# Altium PCB Central_Unit_AgOpenGPS.pcbdoc (part 3 of 4)
Units mm, origin at the board's own origin, x right, y up, seen from the top; angles counter-clockwise.
Board outline 200.19 x 122.57 mm, 2 copper layers (Top Layer, Bottom Layer); 278 components, 223 nets, 1042 pads, 421 vias.
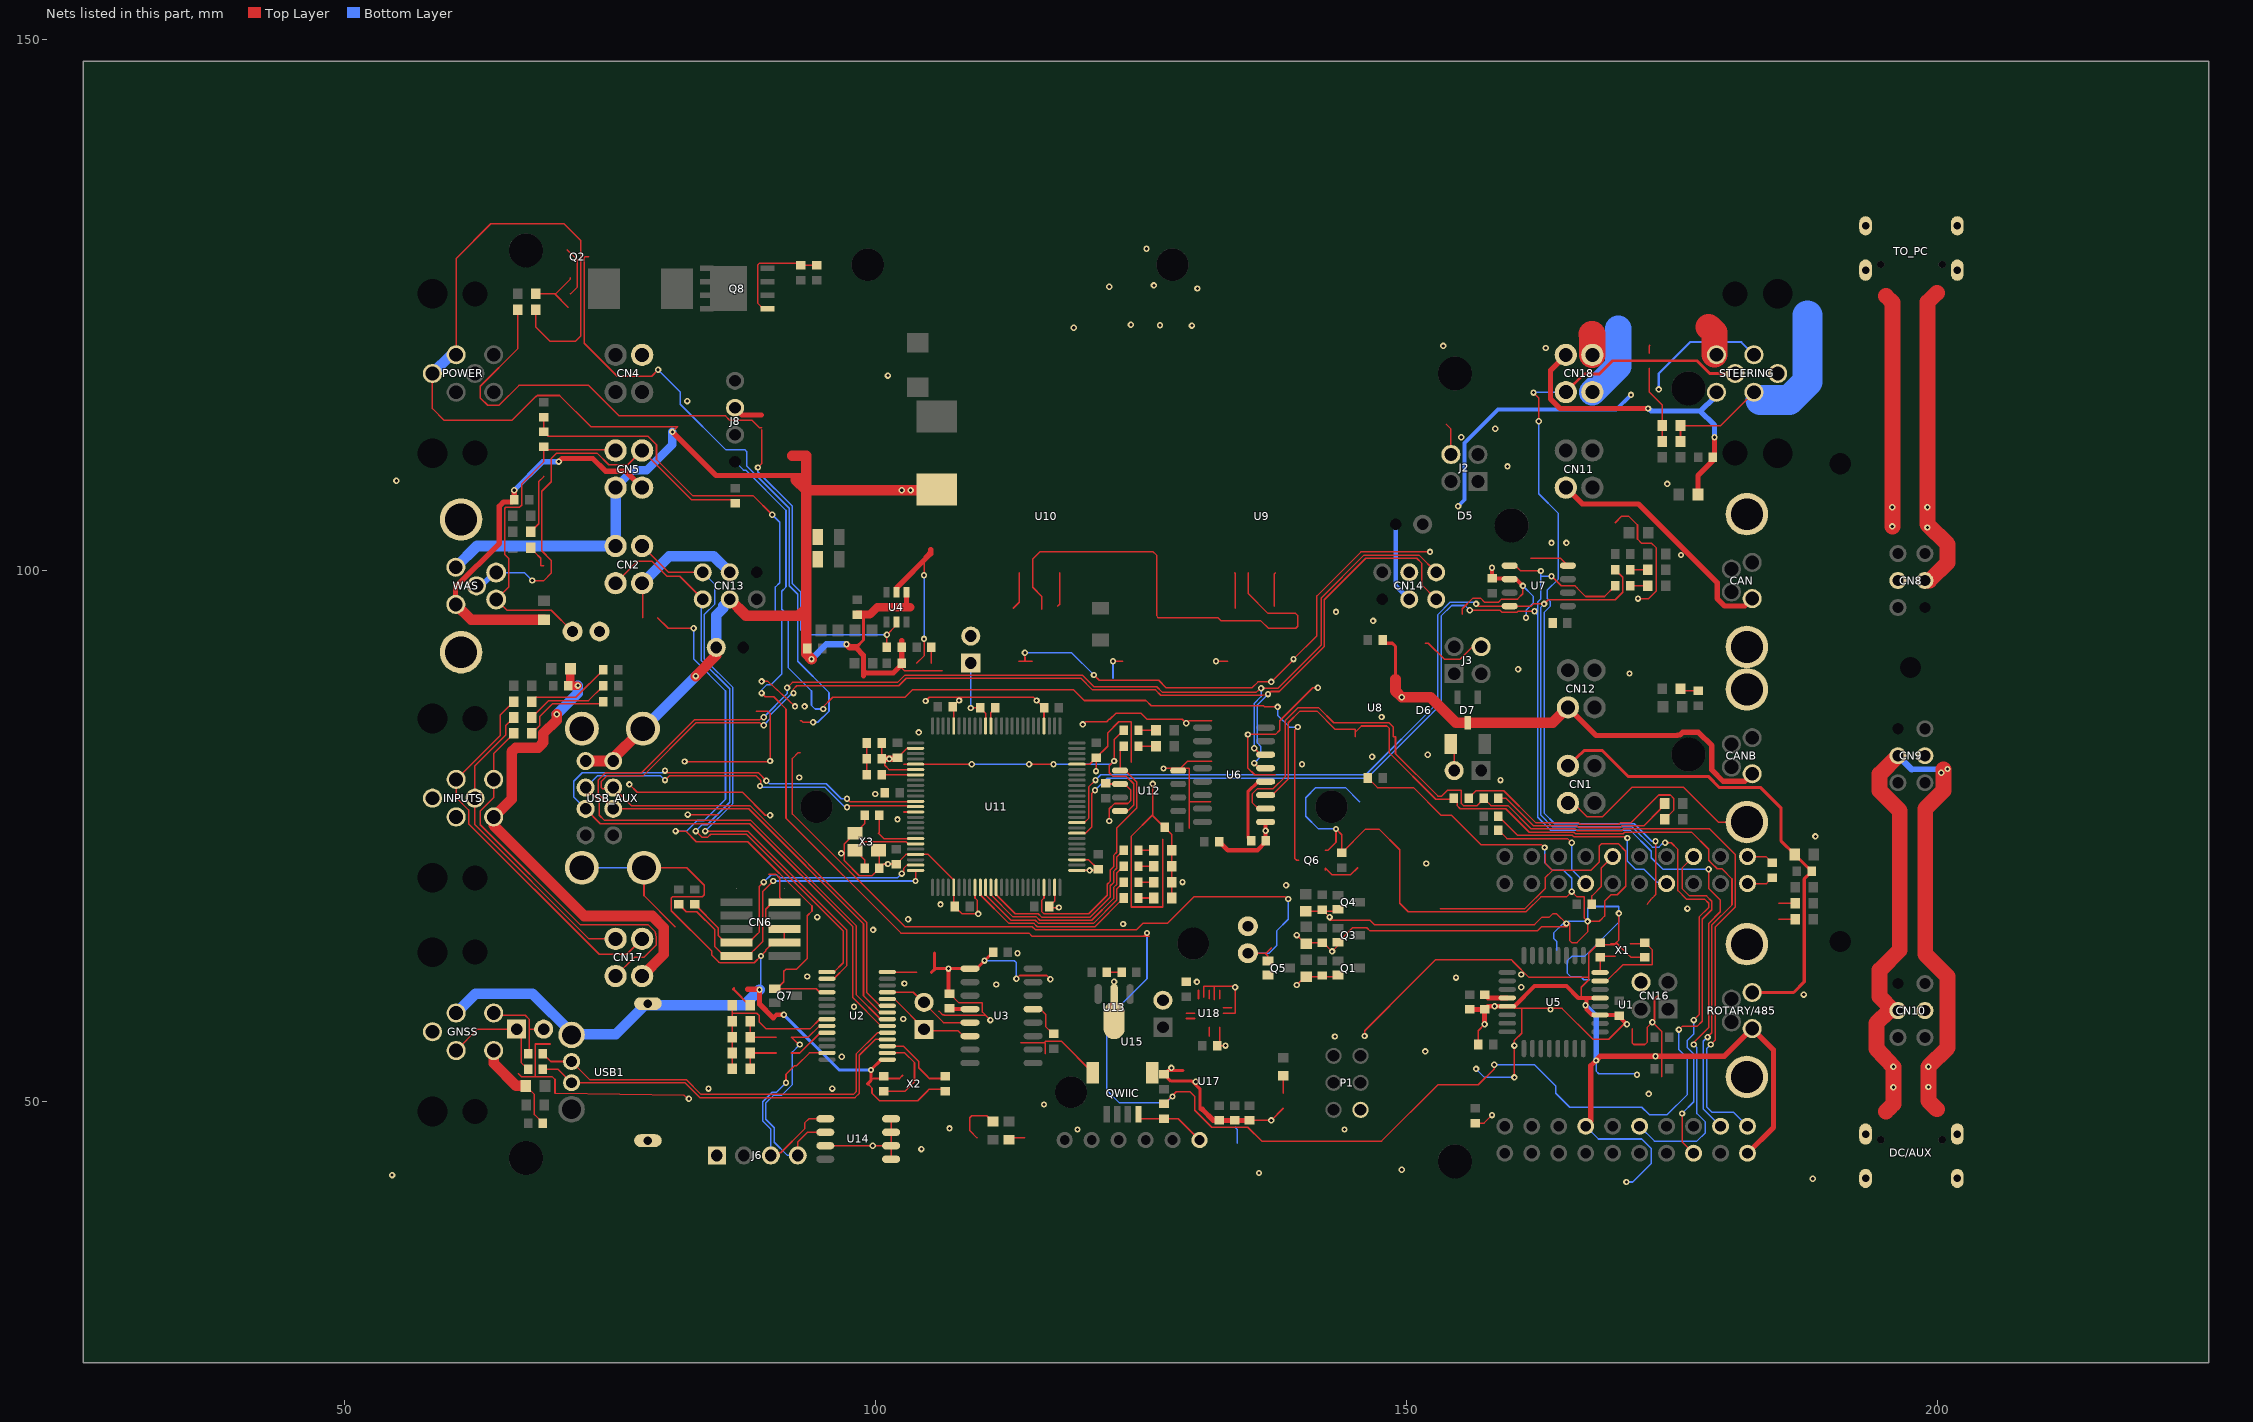
[diagram p3: the nets of this part, all layers, seen from the top]

## Via types
v1: diameter 0.6, hole 0.3, Top Layer to Bottom Layer, 420 vias
v2: diameter 0.61, hole 0.305, Top Layer to Bottom Layer, 1 vias

## Nets (pads, with @x,y where several pads share a name; then routed paths per layer and width w, separated by ;. In a path a pad name is that pad's centre, name@x,y a point inside that pad or via, vN(x,y) a via of type N, cw(c..) or ccw(c..) an arc to the next point about the centre after c; other vN are vias at no path point) (continued)
GND: 12V.1 BOOT.2 C1.1 C2.2 C3.2 C4.2 C5.1 C6.1 C8.1 C9.1 C10.1 C11.2 C12.1 C13.1 C14.2 C15.2 C17.1 C18.1 C19.1 C20.1 C21.1 C22.2 C23.2 C24.1 C25.1 C26.2 C27.1 C28.1 C29.1 C32.2 C33.1 C34.2 C35.2 C36.2 C37.1 C38.2 C39.1 C40.2 C41.1 C42.1 C43.1 C44.1 C45.1 C46.1 C47.1 C48.1 C49.1 C50.1 C51.1 C52.2 C53.2 C54.1 C55.1 C56.2 C57.1 CAN.3 CAN.Shield CANB.3 CANB.Shield CN1.3 CN2.4 CN4.3 CN5.2 CN6.3 CN6.5 CN6.9 CN7.2 CN11.3 CN12.3 CN13.4 CN14.4 CN15.2 CN16.4 D2.1 D5.3 D6.3 D7.3 GNSS.4 GNSS.Shield INPUTS.3 INPUTS.Shield J5.2 J6.1 J7.2 LED1.1 LED2.1 LED3.1 LED4.1 P1.6 POWER.3 POWER.Shield Q1.2 Q3.2 Q4.2 Q5.2 Q6.2 QWIIC.1 QWIIC.5 QWIIC.6 R1.1 R10.1 R14.1 R16.2 R18.1 R25.2 R26.2 R27.2 R36.1 R38.2 R42.2 R44.1 R47.1 R70.1 R77.2 R81.2 R82.2 R93.2 ROTARY/485.3 ROTARY/485.Shield STEERING.3 STEERING.Shield U1.1 U1.4 U1.27 U2.1 U3.1 U4.1 U5.3 U5.5 U5.21 U6.1 U7.2 U7.8 U8.5 U11.2 U11.6 U11.14 U11.22 U11.30 U11.34 U11.49 U11.51 U11.53 U11.71 U11.79 U11.96 U12.2 U12.8 U13.2 U14.1 U14.2 U14.3 U14.4 U14.7 U15.6 U17.1 U17.3 U18.5 U18.7 U18.10 U18.12 USB1.0 USB1.4 USB_AUX.4 USB_AUX.8 USB_AUX.9 WAS.3 WAS.Shield X1.2 X1.4 X2.2 X2.4 X3.2 X3.4 | length 1208.7
  Top Layer w0.145: POWER.Shield@58.287,118.566 58.287,115.266 59.387,114.166 65.787,114.166 68.02,116.399 68.05,116.399 68.143,116.493 70.26,116.493 73.187,113.566 81.387,113.566 v1(80.887,113.066) ; POWER.3@60.519,120.334 60.519,129.398 63.788,132.667 70.686,132.667 72.236,131.117 72.236,122.065 71.786,121.615 69.337,121.615 68.037,122.916 12V.1@68.037,124.566 ; 66.387,52.616 66.687,52.316 68.066,52.316 ; 69.387,55.416 67.987,55.416 67.987,52.316 69.587,52.316 69.832,52.072 69.832,50.765 81.987,50.566 v1(82.437,50.266) ; v1(76.837,79.866) 77.587,79.116 87.487,79.116 89.637,76.966 v1(90.087,76.966) ; USB_AUX.9@78.211,72.015 78.211,69.392 81.137,66.466 ; USB_AUX.9@78.212,72.017 82.238,72.017 83.887,70.366 83.887,69.466 83.688,69.266 80.887,69.266 80.788,69.167 80.788,67.965 84.588,64.165 84.588,63.784 85.245,63.129 85.387,63.066 88.588,63.066 v1(89.228,63.706) 89.688,64.165 89.688,64.267 90.381,64.96 CN6.3@91.437,64.961 CN6.5@91.437,66.231 ; v1(82.037,82.016) 90.037,82.016 v1(90.087,82.066) 90.087,86.568 89.889,86.766 88.786,86.766 ; v1(82.337,77.016) 85.187,77.016 ; v1(89.287,89.566) 89.887,89.566 v1@92.436,87.216 ; 89.987,71.416 90.587,71.416 90.987,71.016 90.987,69.221 CN6.9@91.437,68.771 90.343,68.77 89.688,68.115 89.688,66.766 90.221,66.23 CN6.5@91.437,66.231 ; CN6.5@90.252,66.231 CN6.5@91.437,66.231 ; U14.7@95.287,45.832 99.752,45.831 U14.2@101.487,45.832 ; X3.2@98.087,75.266 97.087,74.265 97.087,72.667 98.489,71.265 99.685,71.265 C39.1@100.387,71.966 ; X3.2@98.087,75.266 98.987,76.166 C37.1@98.987,76.966 ; C12.1@99.287,51.666 99.688,51.265 99.688,50.767 100.386,50.066 103.988,50.066 X2.2@104.787,50.866 ; X3.4@100.287,73.666 100.387,73.566 C39.1@100.387,71.966 100.787,72.366 101.987,72.366 102.887,73.266 U11.22@103.787,73.266 104.987,73.266 107.387,70.866 U11.30@107.387,70.166 107.387,68.466 C54.1@107.487,68.366 ; R82.2@100.587,82.266 100.887,82.266 100.887,81.666 101.288,81.265 U11.6@103.787,81.266 ; R82.2@100.587,82.266 R81.2@100.587,83.766 ; U14.1@101.487,44.562 U14.4@101.487,48.372 ; C47.1@102.087,82.366 102.987,83.266 U11.2@103.787,83.266 ; R70.1@102.487,91.266 102.487,90.816 102.737,90.566 106.287,90.566 ; 102.687,77.266 U11.14@103.787,77.266 ; v1(104.737,87.716) 105.087,88.066 108.48,88.066 ; 105.987,58.517 106.338,58.166 106.437,58.166 106.487,58.115 110.386,58.115 v1(110.837,57.666) ; C1.1@106.987,60.166 107.837,59.316 110.087,59.316 110.087,58.416 v1(110.837,57.666) ; U11.96@107.387,85.366 107.387,87.066 C46.1@107.287,87.166 108.187,88.066 114.887,88.066 C43.1@115.887,87.066 U11.79@115.887,85.366 ; C54.1@107.487,68.366 108.187,67.666 109.487,67.666 109.586,67.767 109.586,68.966 109.388,69.167 U11.34@109.387,70.166 ; v1(113.287,61.566) 113.587,61.866 116.137,61.866 v1(116.487,61.516) ; R26.2@113.487,91.466 R42.2@114.787,91.466 ; 113.687,55.516 115.887,55.516 116.037,55.666 117.537,55.666 QWIIC.5@120.487,52.716 ; v1(114.087,92.266) 114.097,91.465 ; 115.95,55.579 115.987,55.542 115.987,54.516 ; U11.49@116.887,70.166 116.887,68.866 C50.1@116.387,68.366 116.487,68.266 v1(117.287,68.266) ; U11.51@118.987,71.766 v1(120.185,71.766) 120.887,71.766 C41.1@120.987,71.866 120.087,72.766 U11.53@118.987,72.766 ; U11.71@118.987,81.766 120.187,81.766 C42.1@120.787,82.366 ; v1(119.537,85.516) 119.787,85.766 121.087,85.766 ; v1(120.587,90.166) 121.087,89.666 126.688,89.667 127.387,88.966 135.489,88.966 136.038,89.515 v1(137.287,89.516) 139.387,91.615 v1(139.387,91.666) 141.587,93.866 141.587,97.616 145.737,101.766 v1(152.237,101.766) ; v1(120.787,81.116) 120.787,82.268 120.887,82.367 C42.1@120.787,82.366 121.887,83.467 121.887,84.717 122.936,85.766 124.087,85.766 124.087,81.966 ; 120.987,85.766 121.787,85.766 122.013,85.992 122.087,85.992 122.661,86.566 125.023,86.566 125.597,85.992 128.912,85.992 v1(129.287,85.616) 129.537,85.866 131.687,85.866 ; C40.2@121.687,79.966 121.752,79.901 U12.2@123.047,79.901 123.503,79.901 124.036,79.365 124.036,78.316 123.787,78.067 122.538,78.067 122.037,77.566 v1(122.037,76.416) ; C53.2@121.787,62.166 C52.2@123.187,62.166 ; v1(122.387,91.466) R25.2@123.287,91.466 ; QWIIC.1@124.787,48.816 124.788,48.367 127.186,48.367 128.537,48.367 130.137,46.766 U15.6@130.386,46.766 ; 126.137,76.998 124.087,74.948 124.087,68.316 127.087,68.316 127.087,74.716 ; v1(126.137,79.916) 126.137,76.916 127.937,75.116 ; v1(127.137,81.366) 129.587,81.366 129.587,75.716 ; LED1.1@127.937,69.166 127.937,75.116 ; 127.937,74.606 127.937,75.116 ; U12.8@128.527,81.171 129.422,82.066 131.687,82.066 ; 129.586,78.237 131.588,78.217 ; 130.94,59.804 130.94,60.866 131.938,60.866 ; 131.938,59.566 131.938,60.866 ; 131.938,59.667 131.938,60.866 ; v1(132.087,91.466) R27.2@133.187,91.466 ; U18.5@132.439,56.966 132.439,55.518 C8.1@132.187,55.266 v1(132.987,55.266) ; U18.7@132.789,58.316 133.886,58.316 v1(133.886,60.767) 133.886,60.866 131.938,60.866 ; v1(135.087,84.566) 135.087,81.416 135.737,80.766 137.687,80.766 ; C25.1@135.239,48.217 v1(137.287,48.217) R10.1@138.429,49.358 ; v1@135.337,84.567 137.686,84.567 138.088,84.966 138.088,85.865 141.189,88.966 v1(141.687,88.966) ; v1(139.687,60.966) 140.587,61.867 R44.1@140.587,62.065 ; v1(139.687,65.666) 140.286,65.067 R47.1@140.587,65.067 ; R36.1@140.53,67.915 143.381,67.915 Q4.2@143.571,68.105 ; R44.1@140.587,61.766 143.432,61.766 Q1.2@143.571,61.905 ; R47.1@140.587,65.066 140.687,64.966 C29.1@142.087,64.966 142.187,64.966 v1(143.019,64.134) 143.571,64.687 Q3.2@143.571,65.005 ; C27.1@142.087,68.066 v1(142.787,67.366) ; Q6.2@142.387,73.666 142.637,73.665 143.389,74.417 v1(143.387,75.666) ; v1(142.787,67.366) 142.787,67.066 146.586,67.066 146.988,66.665 162.086,66.665 162.787,67.366 163.488,67.366 163.787,67.666 164.189,67.666 v1(165.087,66.766) ; v1(143.387,75.666) 143.937,75.116 R77.2@143.937,73.416 146.177,75.656 147.447,75.656 149.388,73.715 149.388,68.666 150.188,67.866 161.288,67.866 162.687,69.266 165.088,69.266 v1(165.587,69.766) 166.087,69.266 166.787,69.266 166.787,67.266 v1(167.087,66.966) 168.187,66.966 168.287,67.066 168.316,67.097 168.687,67.465 168.687,68.867 169.286,69.466 169.888,69.466 170.688,70.267 170.688,73.563 169.988,74.267 168.387,74.267 168.187,74.066 168.187,72.565 167.386,71.765 163.787,71.765 ; Q3.2@143.571,65.005 144.933,66.365 146.287,66.365 146.589,66.065 162.337,66.065 162.738,66.467 165.187,66.467 165.187,66.766 164.788,66.766 165.388,66.766 165.388,65.166 165.588,64.966 166.086,64.966 167.087,65.966 v1(167.087,66.966) ; v1@146.087,56.166 146.087,56.666 150.887,61.466 152.787,63.366 153.987,63.366 159.887,63.366 160.187,63.066 161.532,61.721 167.188,61.721 ; R93.2@146.388,80.467 147.29,79.563 150.691,79.563 153.287,76.967 154.267,76.967 156.886,74.346 ; 153.187,68.166 161.186,68.166 163.086,70.066 163.086,71.067 163.787,71.765 ; 155.286,95.915 155.286,96.398 156.304,97.417 156.988,97.417 157.387,97.015 158.687,97.015 158.987,97.315 160.488,97.315 160.988,97.815 v1@160.988,98.565 ; C56.2@156.487,47.966 157.337,47.966 v1(158.087,48.716) ; C57.1@156.787,55.366 156.787,56.666 v1(157.387,57.266) ; 156.815,74.417 157.066,74.166 162.787,74.166 v1(163.037,73.916) ; U5.21@159.518,58.966 160.188,58.966 160.188,58.765 164.686,58.765 167.587,55.865 169.088,55.865 170.488,57.267 v1(170.787,57.266) ; v1(160.187,52.266) v1(160.187,55.266) 160.188,55.738 160.887,56.436 160.887,58.765 163.488,58.765 v1(163.587,58.666) ; 161.737,101.166 164.532,101.166 U7.8@165.227,100.471 ; 163.086,73.266 163.086,72.466 163.787,71.765 ; 164.829,71.765 163.787,71.765 ; CN1.3@165.237,78.116 165.738,78.115 167.036,76.815 168.486,76.815 171.287,79.616 176.087,79.616 179.387,76.316 CANB.Shield@182.087,76.316 ; C5.1@167.987,64.766 169.587,64.766 X1.4@169.687,64.866 170.037,65.216 v1(170.037,67.716) ; C5.1@167.988,64.765 167.188,63.967 167.188,61.468 166.487,60.767 166.487,59.746 U5.5@168.255,59.746 ; 169.287,64.866 169.887,64.866 X1.2@171.087,63.666 171.187,63.566 C6.1@172.487,63.566 ; 169.687,104.516 170.313,105.142 170.941,105.142 171.787,104.296 171.787,102.966 172.187,102.566 173.137,102.566 173.537,102.166 173.537,98.066 172.837,97.366 v1(171.837,97.366) ; 171.287,56.866 171.287,55.516 171.437,55.366 172.487,55.366 172.687,55.566 172.687,56.964 v1(173.187,57.466) ; 173.688,59.967 173.386,59.667 173.386,57.666 v1(173.187,57.466) ; 174.087,52.316 174.087,56.566 v1(173.187,57.466) ; U1.1@182.147,73.066 183.887,73.066 C55.1@184.487,72.466
  Top Layer w0.15: C12.1@99.287,51.666 99.787,52.166 100.787,52.166 102.287,52.166 X2.4@102.587,52.466 ; X2.2@104.787,50.866 105.087,51.166 C23.2@106.387,51.166
  Top Layer w0.3: R18.1@98.187,92.766 98.887,93.466 98.887,95.867 ; C19.1@98.286,95.867 98.786,95.867 98.987,95.667 ; C12.1@99.287,51.666 99.587,51.966 v1(99.587,52.966) 100.56,53.938 U2.1@101.132,53.938 ; C10.1@105.587,63.966 105.587,62.465 R1.1@105.287,62.166 105.632,62.511 v1(106.897,62.511) U3.1@108.915,62.511 109.532,62.511 v1(110.287,63.266) C35.2@111.087,64.066 ; U17.3@128.988,51.917 129.836,51.917 130.587,51.166 130.587,49.266 ; U17.1@128.988,52.917 127.538,52.917 C9.1@127.187,52.566 127.837,51.916 129.837,51.916 ; C36.2@147.787,93.466 148.088,93.165 148.687,93.165 148.992,92.86 U8.5@148.992,89.786
  Top Layer w0.4: 90.387,57.866 90.687,58.166 v1(91.387,58.166) ; v1(106.897,62.511) 106.897,60.256 C1.1@106.987,60.166 ; C4.2@132.387,74.466 133.188,73.665 135.987,73.665 136.759,74.437 v1@136.759,75.26 ; U6.1@136.759,76.321 v1(136.759,75.492) 136.759,74.594 C38.2@136.787,74.566 ; v1(158.087,100.266) C2.2@158.087,99.266 160.287,99.266 v1@160.987,98.566 ; U5.21@159.518,58.959 160.181,58.959 162.087,60.866 165.087,60.866 166.207,59.746 166.988,59.746 ; U5.3@168.255,58.148 167.503,58.148 166.988,58.666 166.988,59.746 ; U5.5@168.255,59.746 166.988,59.746 ; U5.3@168.256,58.149 169.904,58.149 v1(170.787,57.266)
  Top Layer w0.45: C22.2@155.987,58.666 157.187,58.666 C3.2@157.287,58.566 ; v1(157.387,57.266) 157.387,58.566 C3.2@157.287,58.566 ; U5.21@159.518,58.966 v1(158.324,58.962) 157.681,58.959 C3.2@157.287,58.566
  Top Layer w0.5: v1(80.887,113.066) 84.987,108.966 93.487,108.966 ; R14.1@87.987,60.566 89.038,60.566 v1(89.087,60.516) 89.087,59.165 90.387,57.866 ; R18.1@98.187,92.766 98.887,92.016 98.887,90.066 ; 98.888,90.665 98.888,90.566 99.086,90.366 101.687,90.366 102.487,91.166 102.487,93.416 102.487,93.366 ; U4.1@102.937,97.966 102.937,96.616 102.987,96.566 ; 130.788,49.266 131.837,48.217 C25.1@135.239,48.217 ; CN11.3@165.037,107.816 166.588,106.266 171.887,106.266 179.287,98.866 179.287,97.366 179.987,96.666 181.887,96.666 CAN.3@182.587,97.366 ; CN12.3@165.237,87.116 167.887,84.466 175.527,84.466 175.577,84.516 175.787,84.516 176.037,84.766 177.537,84.766 178.787,83.516 178.787,81.216 179.837,80.166 181.888,80.166 CANB.3@182.587,80.866 ; U1.27@166.907,47.666 167.387,48.146 167.387,53.366 168.287,54.266 179.987,54.266 ROTARY/485.3@182.587,56.866 184.587,54.866 184.587,47.566 U1.4@182.147,45.126
  Top Layer w0.6: v1(97.287,93.066) 97.587,92.766 R18.1@98.187,92.766 ; R82.2@100.587,82.266 v1(101.312,82.266) 101.987,82.266 C47.1@102.087,82.366
  Top Layer w0.8: C19.1@98.287,95.866 99.487,95.867 100.188,96.566 103.287,96.566
  Top Layer w1: USB_AUX.4@72.712,82.066 75.061,82.066 USB_AUX.9@78.112,85.117 ; v1(83.087,90.066) 85.017,92.022 CN7.2@85.017,92.766 ; CN13.4@86.287,97.296 87.817,95.766 92.787,95.766 93.387,96.366 C18.1@93.487,96.366 ; C32.2@92.187,110.816 93.488,110.815 93.488,92.166 v1(93.987,91.666) ; 92.487,108.566 93.487,107.566 v1(102.487,107.566) v1(103.325,107.566) 105.722,107.566 D2.1@105.787,107.631 ; U8.5@148.992,89.786 148.992,88.661 v1(149.586,88.067) 152.286,88.067 154.686,85.667 155.786,85.667 163.787,85.667 CN12.3@165.237,87.116
  Bottom Layer w0.145: USB_AUX.9@72.361,72.015 USB_AUX.9@78.211,72.015 ; v1(89.087,60.516) 89.228,60.657 v1(89.228,63.706) ; v1(110.287,63.266) 113.087,63.266 113.287,63.066 v1@113.287,61.566 ; v1(114.087,92.266) 118.487,92.266 v1(120.587,90.166) ; 122.387,89.866 v1(122.387,91.466) ; v1@143.386,75.667 141.738,75.667 140.536,76.865 140.536,78.616 141.486,79.566 144.288,79.566 145.636,78.217 ; v1(156.587,53.066) 157.387,52.266 v1(160.187,52.266) ; v1(160.987,98.566) 161.987,97.566 161.987,96.966 161.437,96.416 161.287,96.266 v1(161.287,95.566) ; v1(163.037,73.916) 163.037,72.516 163.787,71.766 164.837,71.766 165.587,71.016 v1(165.587,69.766) ; 164.186,64.267 164.186,65.065 163.886,65.367 163.886,65.865 v1@164.788,66.766 ; U1.27@166.907,47.666 168.107,46.466 172.187,46.466 173.087,45.566 173.087,44.166 171.337,42.416 v1(170.737,42.416) ; 167.287,61.465 166.734,61.465 166.434,61.765 165.487,61.765 165.187,62.065 165.187,63.266 165.588,63.665 166.787,63.665 170.038,66.916 v1(170.037,67.716) 170.037,68.366 167.287,68.366 167.087,68.166 v1(167.087,66.966) 165.287,66.966 v1(165.087,66.766) ; v1(167.887,53.866) 167.887,52.865 168.138,52.616 171.636,52.616 v1(171.737,52.516) ; v1@164.787,66.766 v1(165.087,66.766) ; v1@164.788,66.766 v1(165.087,66.766)
  Bottom Layer w0.15: 133.887,47.566 134.087,47.366 134.087,46.066
  Bottom Layer w0.2: v1(173.787,117.066) 173.787,118.566 176.737,121.516 181.574,121.516 STEERING.3@182.755,120.334
  Bottom Layer w0.3: v1(91.387,58.166) 96.587,52.966 v1(99.587,52.966)
  Bottom Layer w0.35: v1(154.887,106.066) 155.487,106.666 155.487,112.012 158.641,115.166 162.421,115.166 ; 159.187,115.166 158.787,115.166 169.787,115.166 v1(171.172,116.55)
  Bottom Layer w0.5: v1(166.887,59.066) 167.887,58.066 v1(167.887,53.866)
  Bottom Layer w0.6: v1(93.987,91.666) 95.387,93.066 v1(97.287,93.066)
  Bottom Layer w0.8: CN5.2@75.537,107.816 77.189,109.466 78.486,109.466 80.887,111.867 v1(80.887,113.066)
  Bottom Layer w1: POWER.Shield@58.287,118.566 60.055,120.334 POWER.3@60.519,120.334 ; WAS.3@60.487,100.316 62.487,102.316 CN2.4@75.537,102.316 CN5.2@75.537,107.816 ; GNSS.4@60.519,58.334 62.35,60.165 67.689,60.165 71.537,56.317 75.538,56.317 78.287,59.066 87.638,59.066 v1(89.087,60.516) ; USB_AUX.9@78.112,85.117 78.138,85.117 v1(83.087,90.066) ; CN7.2@85.017,92.766 85.017,95.796 85.687,96.466 85.687,96.696 CN13.4@86.287,97.296
  other v1: 188.287,42.716 54.487,43.066 136.137,43.266 149.587,43.566 104.337,45.516 99.752,45.831 119.037,47.366 144.187,47.366 106.987,47.466 115.887,49.716 172.837,50.716 84.287,51.216 95.937,51.216 130.187,51.866 127.887,53.166 96.837,54.216 173.487,54.266 151.787,54.716 143.287,56.116 146.087,56.166 102.637,57.766 97.987,58.916 187.437,60.066 160.837,60.766 111.387,61.016 102.737,61.116 130.287,61.266 122.487,61.279 154.687,61.666 93.587,61.766 160.837,61.966 113.387,63.966 99.787,66.166 123.337,66.716 103.087,67.166 94.537,67.366 109.687,67.666 176.487,68.166 106.137,68.566 138.687,70.366 128.937,70.666 101.187,72.366 151.887,72.416 96.787,73.366 188.537,74.966 102.087,76.566 99.987,78.966 158.887,80.266 92.837,80.516 140.187,81.766 146.787,82.466 152.037,82.666 104.087,84.766 147.687,86.216 92.437,87.216 93.337,87.216 107.887,87.766 115.187,87.766 171.037,90.316 160.537,90.716 146.887,95.266 143.387,96.116 175.887,101.466 163.687,102.616 165.087,102.616 174.587,108.166 54.887,108.466 159.537,109.816 155.187,112.566 158.387,113.366 82.287,115.966 101.187,118.366 163.137,120.966 153.487,121.166
GND1: CN8.4 TO_PC.1 TO_PC.2 TO_PC.3 TO_PC.4 TO_PC.A1 TO_PC.A12 TO_PC.B1 TO_PC.B12
GND2: CN9.4 CN10.4 DC/AUX.1 DC/AUX.2 DC/AUX.3 DC/AUX.4 DC/AUX.A1 DC/AUX.A12 DC/AUX.B1 DC/AUX.B12
GNSS+: F1.1 GNSS.2 R64.2 | length 9.3
  Top Layer w0.145: F1.1@67.087,51.466 67.887,50.665 67.887,48.765 R64.2@68.687,47.966
  Top Layer w1: GNSS.2@64.054,54.798 64.054,53.599 66.188,51.465 F1.1@67.087,51.466
GNSS_1: CN3.2 GNSS.1 R46.1 | length 8.2
  Top Layer w0.145: GNSS.1@64.055,58.334 64.273,58.116 67.037,58.116 67.387,57.766 67.387,54.616 R46.1@67.287,54.516 ; 67.387,56.816 CN3.2@68.757,56.816
GNSS_3: CN3.1 GNSS.3 R43.1 | length 10.8
  Top Layer w0.145: GNSS.3@60.519,54.798 62.537,56.816 CN3.1@66.217,56.816 66.637,56.396 66.637,53.666 R43.1@67.287,53.016
IN0: CN17.4 INPUTS.5 STEER.2 | length 29.3
  Top Layer w0.145: STEER.2@65.936,86.167 65.187,85.415 65.187,84.516 62.286,81.615 62.286,78.567 62.286,76.065 73.036,65.316 CN17.4@75.537,65.316
IN1: CN17.2 INPUTS.1 WORK.2 | length 36.9
  Top Layer w0.145: WORK.2@65.936,84.666 64.054,82.784 64.054,80.335 64.054,78.633 62.787,77.366 62.787,76.065 72.187,66.665 78.588,66.665 79.287,65.966 79.363,65.481 79.363,64.742 78.187,63.566 77.288,63.566 CN17.2@75.537,61.816
IN2: CN17.3 INPUTS.4 REMOTE.2 | length 36.3
  Top Layer w0.145: REMOTE.2@65.936,87.666 64.687,86.416 64.687,84.503 INPUTS.4@60.519,80.334 60.519,78.633 61.687,77.465 61.687,76.167 73.988,63.866 76.587,63.866 CN17.3@78.037,65.316
IN+: CN17.1 F4.2 INPUTS.2 R73.2 | length 45.8
  Top Layer w0.8: R73.2@71.087,89.166 v1(71.987,89.166) ; R73.2@71.087,89.166 71.288,89.167 F4.2@71.287,90.766
  Top Layer w1: v1(69.987,86.466) 69.988,85.915 68.738,84.668 68.738,83.817 68.238,83.317 66.137,83.317 65.738,82.916 65.738,78.481 64.054,76.797 64.054,75.999 72.586,67.465 78.987,67.465 80.087,66.365 80.087,63.866 CN17.1@78.037,61.816
  Bottom Layer w1: v1(69.987,86.466) 71.987,88.466 v1(71.987,89.166)
INH: R61.2 U9.3 U10.3 | length 45.2
  Top Layer w0.145: U10.3@114.817,99.782 114.817,101.096 115.487,101.766 126.187,101.766 126.487,101.466 126.487,95.764 126.62,95.565 132.286,95.565 132.586,95.265 136.322,95.265 137.023,94.567 139.589,94.567 139.787,94.765 139.787,95.766 139.586,95.966 136.988,95.966 135.118,97.836 U9.3@135.117,99.782
  Top Layer w0.15: 114.816,99.781 114.816,98.435 115.687,97.566 115.687,96.366
J1_1: CN14.3 J1.1 | length 7.6
  Bottom Layer w0.45: J1.1@149.017,104.366 149.017,98.567 CN14.3@150.287,97.297
J2_4: J2.4 R60.2 | length 3
  Top Layer w0.145: R60.2@153.787,113.766 154.217,113.336 J2.4@154.217,110.936
J4_2: J4.2 R92.1 | length 2.6
  Top Layer w0.145: R92.1@154.187,83.666 154.517,83.336 J4.2@154.517,81.166
J8_3: J8.3 R15.2 | length 2.8
  Top Layer w0.5: J8.3@86.787,115.336 87.457,114.666 R15.2@89.287,114.666
LED1_2: LED1.2 R84.1 | length 1.5
  Top Layer w0.145: R84.1@124.787,69.166 LED1.2@126.237,69.166
LED2_2: LED2.2 R85.1 | length 1.5
  Top Layer w0.145: R85.1@124.787,70.666 LED2.2@126.237,70.666
MA: CN18.4 M1.2 M2.1 STEERING.4 STEERING.@180.987,126.066 STEERING.@184.987,126.066 U10.8 | length 28.1
  Top Layer w0.145: M1.2@175.837,112.166 M2.1@175.837,113.666 ; M2.1@175.837,113.666 179.623,113.666 STEERING.4@182.755,116.798
  Bottom Layer w2.5: CN18.4@167.536,116.815 169.987,119.266 169.987,122.766
  Bottom Layer w2.8: 183.337,116.066 186.086,116.066 187.806,117.785 187.806,124.043
  other v1: 129.812,123.077 126.815,123.102 124.072,123.153 130.337,126.566 122.04,126.735 126.237,126.866 125.537,130.316
  other v2: 118.687,122.866
MB: CN18.2 R24.2 STEERING.2 U9.4 U9.8 | length 5.6
  Top Layer w0.145: 172.887,120.466 172.887,121.166 172.937,121.216
  Top Layer w2.45: 178.487,122.966 179.019,122.434 STEERING.2@179.019,120.334
  Top Layer w2.5: 167.488,122.265 167.536,122.265 CN18.2@167.536,120.315
OUT: J8.1 Q6.3 | length 89.5
  Top Layer w0.145: v1(95.087,86.966) 95.086,86.965 94.986,86.965 94.986,87.066 95.985,88.067 102.787,88.067 103.488,88.765 118.687,88.765 119.685,87.767 125.487,87.767 125.987,87.267 136.388,87.267 ; 135.158,87.267 136.545,87.267 136.646,87.166 v1(137.887,87.166) ; v1(139.787,85.266) 139.487,84.966 139.487,72.916 139.688,72.715 Q6.3@139.888,72.716
  Bottom Layer w0.145: 86.998,110.256 J8.1@86.787,110.256 87.577,109.466 87.788,109.466 91.588,105.667 91.588,98.466 91.186,98.067 91.186,96.368 91.786,95.768 91.786,90.866 93.988,88.664 93.988,87.307 94.328,86.967 v1@94.986,86.967 ; v1(137.887,87.166) 137.887,86.386 139.007,85.266 v1(139.787,85.266)
R3_2: AUX0.1 GNSS_.2 R3.2 | length 4.8
  Top Layer w0.15: AUX0.1@88.237,53.073 GNSS_.2@88.237,54.566 ; R3.2@90.687,54.566 GNSS_.2@88.237,54.566 ; GNSS_.2@88.237,54.566 87.937,54.866 GNSS_.2@88.237,54.566
R4_1: ARDU.1 AUX1.2 R4.1 | length 4
  Top Layer w0.15: ARDU.1@88.237,57.566 AUX1.2@88.237,56.066 R4.1@90.687,56.066
R8_2: Q2.1 R8.2 | length 4.8
  Top Layer w0.145: Q2.1@70.971,130.226 71.937,129.26 71.937,126.716 R8.2@71.287,126.066
R10_2: LED.2 R10.2 | length 1.6
  Top Layer w0.145: 138.429,50.758 LED.2@138.43,52.409
R14_2: R14.2 USB:.1 | length 2.4
  Top Layer w0.2: R14.2@86.587,60.566 86.688,60.665 86.688,60.515 88.136,59.065 USB:.1@88.237,59.066
R15_1: 12V.2 C44.2 R15.1 U4.5 | length 71.9
  Top Layer w0.145: 12V.2@66.337,124.566 66.338,120.917 62.787,117.366 62.787,116.266 63.488,115.565 64.555,115.565 66.432,117.442 73.013,117.442 75.888,114.567 85.888,114.567 86.287,114.165 88.387,114.165 89.086,113.467 89.287,113.467 ; v1(88.937,109.716) 89.287,110.066 R15.1@89.287,113.266 ; v1(101.087,93.966) C44.2@101.087,92.766 101.087,93.967 101.987,94.866 U4.5@101.987,95.166
  Bottom Layer w0.145: v1@88.936,109.715 88.936,109.317 92.187,106.065 92.187,98.765 92.987,97.965 92.987,94.366 93.389,93.965 v1(101.087,93.966)
R19_2: C16.2 R19.2 | length 1.5
  Top Layer w0.145: R19.2@105.287,91.266 C16.2@105.287,92.766
R22_1: R22.1 TXD.2 | length 4.7
  Top Layer w0.145: R22.1@109.587,46.566 108.887,47.266 108.887,48.466 109.087,48.666 110.487,48.666 111.037,48.116 TXD.2@111.087,48.116
R23_1: R23.1 RXD.2 | length 1.6
  Top Layer w0.145: RXD.2@112.587,46.416 112.737,46.566 R23.1@114.087,46.566
R24_1: M1.1 M2.2 R24.1 | length 7.4
  Top Layer w0.145: R24.1@172.887,119.066 172.887,116.816 174.137,115.566 M1.1@174.137,112.166
R31_2: CHB.1 R31.2 | length 1.5
  Top Layer w0.145: R31.2@185.087,67.166 CHB.1@186.637,67.166
R32_2: CHA.1 R32.2 | length 1.5
  Top Layer w0.145: R32.2@185.087,68.666 CHA.1@186.637,68.666
R33_1: Q6.1 R33.1 | length 3.8
  Top Layer w0.145: Q6.1@142.387,71.766 142.388,71.966 142.987,71.366 144.788,71.366 R33.1@145.437,72.016
R35_2: Q8.1 R35.2 R39.2 | length 10.5
  Top Layer w0.145: Q8.1@89.845,124.661 89.442,124.661 88.937,125.166 88.937,128.816 89.087,128.966 92.787,128.966 R39.2@92.987,128.766 R35.2@94.487,128.766
R50_1: CN2.1 CN13.3 R50.1 | length 13.2
  Top Layer w0.145: CN2.1@78.037,98.816 78.087,98.766 R50.1@78.087,95.566
  Bottom Layer w1: CN2.1@78.037,98.816 80.587,101.366 84.757,101.366 CN13.3@86.287,99.836
R51_1: MOT.1 R8.1 R49.2 R51.1 | length 5.7
  Top Layer w0.145: R8.1@69.887,126.066 71.287,127.466 R51.1@71.287,127.566
  Top Layer w0.15: MOT.1@68.037,126.066 R8.1@69.887,126.066 ; 69.805,126.065 71.084,124.787
R57_2: R57.2 WAS2.1 | length 5.7
  Top Layer w0.145: WAS2.1@67.537,103.666 68.288,104.417 68.287,108.366 68.786,108.867
R58_2: R58.2 WAS1.1 | length 2.6
  Top Layer w0.145: WAS1.1@67.537,102.166 67.887,102.166 67.887,101.765 68.487,101.166 68.487,100.467 68.786,100.467
R59_2: CN18.3 R59.2 STEERING.5 | length 80
  Top Layer w0.145: v1(161.987,116.766) 162.487,116.266 v1(162.487,114.066) ; R59.2@172.687,68.566 173.086,69.065 173.188,69.167 173.487,69.466 v1(173.487,74.516)
  Top Layer w0.28: CN18.3@165.037,116.815 166.736,118.516 168.187,118.516 169.436,119.766 177.386,119.766 178.588,118.567 STEERING.5@180.987,118.566
  Bottom Layer w0.145: v1(161.987,116.766) 162.036,116.815 CN18.3@165.037,116.815 ; v1(162.487,114.066) 162.487,107.241 164.336,105.392 164.336,99.215 163.287,98.166 163.287,97.366 163.587,97.066 163.587,96.665 162.987,96.065 162.987,77.165 163.985,76.167 171.486,76.167 173.137,74.516 v1(173.487,74.516)
R63_1: Q2.3 R63.1 | length 60.4
  Top Layer w0.145: Q2.3@73.003,129.566 72.586,129.566 72.586,121.417 75.688,118.315 78.939,118.316 v1(79.537,118.916) ; 92.937,85.866 93.039,85.866 93.189,85.716 v1(94.137,85.716)
  Bottom Layer w0.145: v1(79.537,118.916) 81.636,116.817 81.636,115.667 85.936,111.366 87.724,111.366 87.887,111.204 87.887,109.865 90.188,107.566 ; 89.96,107.794 91.89,105.864 ; 91.89,105.865 91.888,98.565 92.688,97.767 92.688,91.465 95.637,88.516 95.637,86.764 94.588,85.715 v1(94.137,85.716)
R65_2: J3.4 R65.2 | length 6.4
  Top Layer w0.145: 151.787,93.166 152.087,93.166 153.587,91.666 155.087,91.666 156.257,92.836 J3.4@157.057,92.836
R67_1: R67.1 TX485.1 | length 18.6
  Top Layer w0.145: R67.1@158.687,78.567 159.388,78.567 161.989,75.966 166.086,75.966 166.246,75.806 170.178,75.806 170.338,75.966 172.388,75.966 173.937,77.516 173.937,78.466 TX485.1@174.337,78.066
R69_1: R69.1 TXCAN.1 | length 1.6
  Top Layer w0.145: R69.1@171.087,98.566 TXCAN.1@172.737,98.566
R72_1: FCAN1.2 R72.1 | length 1.7
  Top Layer w0.145: FCAN1.2@175.837,88.866 176.037,88.666 R72.1@177.487,88.666
R80_2: R80.2 R81.1 R82.1 | length 3
  Top Layer w0.145: R80.2@99.187,80.766 R81.1@99.187,83.766
R86_1: LED3.2 R86.1 | length 1.5
  Top Layer w0.145: R86.1@124.787,72.166 LED3.2@126.237,72.166
R87_1: LED4.2 R87.1 | length 1.5
  Top Layer w0.145: R87.1@124.787,73.666 LED4.2@126.237,73.666
R88_1: R88.1 TXCAN1.1 | length 1.7
  Top Layer w0.145: R88.1@124.787,83.466 TXCAN1.1@126.437,83.466
R89_1: R89.1 RXCAN1.1 | length 1.7
  Top Layer w0.145: R89.1@124.787,84.966 RXCAN1.1@126.437,84.966
REMOTE_1: R40.1 REMOTE.1 | length 8
  Top Layer w0.145: REMOTE.1@67.637,87.666 68.037,88.067 71.789,88.067 R40.1@74.387,90.666
ROT+: CN1.1 F6.2 R75.2 ROTARY/485.1 | length 46.1
  Top Layer w0.3: CN1.1@165.237,81.616 166.787,83.066 168.438,83.066 170.887,80.617 178.456,80.617 179.507,79.566 183.388,79.566 185.288,77.666 185.288,74.567 F6.2@186.586,73.266 ; ROTARY/485.1@182.587,60.266 186.487,60.267 187.488,61.267 187.488,70.965 R75.2@188.187,71.666 ; F6.2@186.587,73.266 R75.2@188.187,71.666
RX485_1: R66.1 RX485.1 | length 24.5
  Top Layer w0.145: R66.1@155.887,78.566 156.586,79.266 159.187,79.266 162.187,76.266 166.223,76.266 166.388,76.103 170.01,76.103 170.173,76.266 171.186,76.266 173.787,78.867 174.887,78.867 175.187,78.565 175.187,77.417 RX485.1@174.337,76.566
RXCAN_1: R68.1 RXCAN.1 | length 1.6
  Top Layer w0.145: R68.1@171.087,100.066 RXCAN.1@172.737,100.066
RXD485: R66.2 U1.7 U6.3 U8.1 | length 85.7
  Top Layer w0.145: U6.3@136.759,78.861 137.381,78.862 138.888,80.366 138.888,85.667 139.988,86.766 141.588,86.766 143.287,85.067 145.182,85.067 145.182,84.552 ; U8.1@145.182,84.346 145.182,84.76 145.786,85.367 148.187,85.367 148.387,85.166 148.387,82.865 152.787,78.466 154.486,78.466 154.486,78.565 154.788,78.265 154.788,77.866 155.088,77.567 159.385,77.567 161.585,75.367 165.786,75.367 165.941,75.212 170.434,75.212 170.592,75.369 176.884,75.369 178.486,73.767 178.487,72.716 178.687,72.517 179.286,71.915 179.637,71.916 179.736,71.915 180.686,70.965 180.686,68.516 178.786,66.617 178.786,56.467 v1(178.387,56.066)
  Bottom Layer w0.145: v1(178.387,56.066) 177.988,55.667 177.988,49.284 U1.7@179.606,47.666
RXDCAN: R68.2 U1.12 U7.4 U11.60 | length 137.1
  Top Layer w0.145: U11.60@118.987,76.266 119.688,76.266 120.087,76.665 120.087,79.615 v1(120.737,80.266) ; v1(156.587,96.866) 156.787,96.665 161.788,96.665 161.986,96.865 v1(162.987,96.866) 163.387,97.266 169.687,97.266 170.387,97.966 170.387,99.366 R68.2@169.687,100.066 ; v1(174.387,74.366) 174.956,74.366 175.588,73.734 175.588,69.865 176.388,69.065 178.088,69.065 178.486,68.666 178.486,68.265 177.587,67.366 177.587,58.166 v1(177.087,57.666) ; v1@175.987,48.866 175.987,46.206 U1.12@177.067,45.126
  Bottom Layer w0.145: v1(120.737,80.266) 121.238,80.767 146.188,80.767 152.987,87.566 152.987,95.865 154.138,97.015 156.586,97.015 v1(156.587,96.866) ; v1(162.987,96.866) 162.687,96.566 162.687,76.967 163.787,75.865 171.288,75.865 173.188,73.965 173.82,73.965 174.219,74.366 v1(174.387,74.366) ; v1@175.987,48.867 177.087,49.967 177.087,54.465 176.487,55.065 176.487,55.766 177.087,56.365 v1(177.087,57.666)
  other v1: 175.987,48.866
RXDCAN1: R89.2 U11.5 U12.4 | length 30.7
  Top Layer w0.145: 102.687,81.766 U11.5@103.787,81.766 108.487,81.766 v1(109.087,81.766) ; v1(114.487,81.766) v1(116.787,81.766) ; U12.4@123.047,77.361 123.782,77.361 124.336,77.917 124.336,79.916 123.638,80.617 122.388,80.617 122.037,80.965 122.037,81.615 v1(122.487,82.066) 122.487,84.066 R89.2@123.386,84.966
  Bottom Layer w0.145: v1(109.087,81.766) v1(114.487,81.766) ; v1(116.787,81.766) 122.187,81.766 v1(122.487,82.066)
S$68: 
S$18375: 
S$55412: 
S$55414: 
S$55416: 
S$55420: 
S$55422: 
S$55424: 
S$55426: 
S$55428: 
S$55430: 
S$55432: 
S$55434: 
S$55436: 
S$55438: 
S$55440: 
S$55442: 
S$55444: 
S$55446: 
S$55452: 
S$55454: 
S$55456: 
S$55458: 
S$55460: 
S$55462: 
S$55464: 
S$55466: 
S$55468: 
S$55470: 
S$55474: 
S$56894:  | length 0.8
  Top Layer w0.145: 132.439,59.666 132.439,60.466
S$56896:  | length 0.8
  Top Layer w0.145: 131.439,59.666 131.439,60.466
S$56898:  | length 0.8
  Top Layer w0.145: 130.439,59.666 130.439,60.466
S$56900:  | length 0.8
  Top Layer w0.145: 132.789,58.816 133.587,58.816
S$56908:  | length 0.8
  Top Layer w0.145: 129.284,58.317 130.089,58.317
S$56910:  | length 0.8
  Top Layer w0.145: 129.284,57.816 130.089,57.816
S$56912:  | length 0.8
  Top Layer w0.145: 131.439,56.166 131.439,56.967
S$57182: 
SERVO+: CN18.1 F7.2 R76.1 STEERING.1 | length 30.7
  Top Layer w0.5: CN18.1@165.037,120.316 163.587,118.866 163.587,116.566 163.587,116.166 164.387,115.366 164.487,115.266 168.187,115.266 v1(172.787,115.266) ; F7.2@177.487,107.166 177.488,108.966 179.037,110.515 v1(179.037,112.566)
  Bottom Layer w0.5: v1(172.787,115.266) 173.087,115.066 177.737,115.016 179.02,116.299 STEERING.1@179.02,116.797 ; 177.687,115.016 179.037,113.716 v1(179.037,112.566)
STEER_1: R41.1 STEER.1 | length 8
  Top Layer w0.145: STEER.1@67.637,86.166 69.238,87.765 72.987,87.765 R41.1@74.387,89.166
STEERENABLE: J7.1 Q5.1 R16.1 R63.2 | length 71.5
  Top Layer w0.145: R63.2@92.937,82.866 92.736,82.865 92.187,82.316 92.187,77.066 102.787,66.467 114.788,66.467 115.085,66.167 124.587,66.167 125.187,66.766 127.488,66.766 129.988,69.266 138.626,69.266 138.827,69.065 v1(138.887,69.066) ; J7.1@135.087,63.966 136.736,63.965 136.97,63.731 Q5.1@136.97,63.226 ; J7.1@135.087,63.966 136.787,63.966 R16.1@137.287,64.466
  Bottom Layer w0.145: J7.1@135.087,63.966 137.088,63.966 137.788,64.666 137.788,66.065 138.888,67.165 v1(138.887,69.066)
SW!: L7.1 R19.1 U4.2 | length 16.6
  Top Layer w0.145: R19.1@103.887,91.266 104.587,91.966 104.587,92.966 v1(104.587,93.566) ; v1(104.587,99.566) 104.587,101.341 L7.1@105.212,101.966
  Top Layer w0.5: U4.2@101.987,97.966 101.987,98.365 105.212,101.591 L7.1@105.212,101.966
  Bottom Layer w0.145: v1(104.587,93.566) v1(104.587,99.566)
SWCLK: CN6.4 R78.2 U11.24 | length 28.7
  Top Layer w0.145: R78.2@82.987,68.566 85.187,66.366 85.187,65.666 85.892,64.961 CN6.4@86.937,64.961 88.082,64.961 88.887,65.766 89.087,65.966 89.087,67.466 89.087,70.266 v1(89.487,70.666) ; v1(102.487,71.466) 102.66,71.638 102.66,71.938 102.987,72.266 U11.24@103.787,72.266
  Bottom Layer w0.145: v1(89.487,70.666) 90.187,71.366 90.687,71.366 90.987,71.066 91.787,71.066 102.087,71.066 v1(102.487,71.466)
SWDIO: CN6.2 R79.2 U11.25 | length 31.9
  Top Layer w0.145: R79.2@81.487,68.566 82.187,67.866 83.187,67.866 84.887,66.166 84.887,64.566 85.762,63.691 CN6.2@86.937,63.691 88.012,63.691 88.987,64.666 89.387,65.066 89.387,67.966 89.387,69.766 v1@90.387,70.766 ; v1(103.787,70.766) U11.25@103.787,71.766
  Bottom Layer w0.145: v1@90.387,70.766 v1(103.787,70.766)
  other v1: 90.387,70.766
TXD485: R67.2 U1.3 U6.2 U8.4 | length 92.9
  Top Layer w0.145: U6.2@136.759,77.591 136.063,77.592 135.487,78.166 135.487,78.966 135.987,79.466 137.488,79.466 138.588,80.566 138.588,85.865 139.787,87.066 141.786,87.066 143.185,85.667 148.385,85.667 148.786,85.265 148.786,84.346 U8.4@148.992,84.346 148.992,82.761 152.987,78.765 153.345,78.765 153.897,79.317 155.136,79.317 155.187,79.266 155.187,78.067 155.388,77.866 156.688,77.866 157.287,78.466 R67.2@157.287,78.567 ; R67.2@157.287,78.566 157.988,77.866 159.586,77.866 161.786,75.667 165.936,75.667 166.094,75.509 170.302,75.509 170.46,75.667 178.585,75.667 180.988,73.264 180.988,68.316 179.088,66.416 179.088,55.766 v1(178.687,55.366)
  Bottom Layer w0.145: v1(178.687,55.366) 178.288,54.966 178.288,49.515 178.837,48.966 180.846,48.966 U1.3@182.146,47.666
TXDCAN: R69.2 U1.19 U7.1 U11.58 | length 146.9
  Top Layer w0.145: U11.58@118.987,75.266 119.787,75.265 120.386,75.865 120.386,79.015 v1(120.687,79.316) ; v1(155.987,96.266) 158.837,96.266 159.038,96.065 160.437,96.065 160.539,96.167 v1(162.087,96.166) ; U7.1@159.746,100.47 160.282,100.47 160.788,99.967 v1(162.687,99.966) ; v1(163.687,99.466) 163.707,99.466 164.607,98.566 165.887,98.566 166.087,98.366 166.89,97.563 168.684,97.563 R69.2@169.687,98.566 ; v1(177.087,55.366) 177.087,55.566 178.487,56.966 178.487,66.766 179.587,67.866 179.587,68.966 178.487,70.066 v1(178.487,71.866)
  Bottom Layer w0.145: v1(120.687,79.316) 121.836,80.465 146.337,80.465 153.287,87.417 153.287,95.715 154.288,96.716 155.537,96.716 v1(155.987,96.266) ; 162.388,95.83 162.088,96.13 v1(162.087,96.166) 162.388,96.484 ; 162.687,99.466 v1(163.687,99.466) ; v1(162.687,99.966) 162.687,98.466 162.687,97.345 162.388,97.046 162.388,76.766 163.589,75.565 171.087,75.565 173.086,73.566 173.086,72.967 174.186,71.867 v1@178.486,71.867 ; U1.19@171.986,47.666 173.386,46.266 177.386,46.266 178.187,47.066 178.187,48.067 177.386,48.867 177.386,55.065 v1(177.087,55.366)
TXDCAN1: R88.2 U11.47 U12.1 | length 25.6
  Top Layer w0.145: U11.47@115.888,70.168 115.888,69.167 115.687,68.966 115.687,67.856 115.888,67.678 120.099,67.678 121.837,69.416 121.837,70.465 122.139,70.767 122.139,71.819 122.436,72.116 122.436,73.165 122.738,73.467 122.738,75.766 124.638,77.666 124.638,80.073 123.533,81.171 U12.1@123.047,81.171 123.048,83.116 R88.2@123.386,83.467
U1_2: C55.2 U1.2 | length 2.6
  Top Layer w0.145: U1.2@182.147,70.526 183.947,70.526 C55.2@184.487,71.066
U1_14: R96.1 U1.14 | length 19.8
  Top Layer w0.145: R96.1@158.687,76.866 160.485,75.067 165.642,75.067 165.793,74.916 170.737,74.916 v1(170.837,74.816)
  Bottom Layer w0.145: v1@170.836,74.816 170.836,72.619 171.588,71.867 172.388,71.867 173.589,70.665 174.526,70.665 U1.14@174.526,70.526
U1_21: R94.1 U1.21 | length 5.3
  Top Layer w0.145: R94.1@167.487,68.566 167.488,69.365 168.387,70.267 168.387,72.006 U1.21@169.446,73.066
U1_26: R95.1 U1.26 | length 11.8
  Top Layer w0.145: R95.1@158.687,75.566 159.487,74.765 165.187,74.765 v1(165.587,74.366)
  Bottom Layer w0.145: v1(165.587,74.366) 165.587,71.846 U1.26@166.907,70.526
U2_2: C13.2 U2.2 X2.1 | length 8
  Top Layer w0.15: C13.2@100.787,50.966 102.787,50.965 103.687,51.866 103.687,53.666 102.78,54.573 U2.2@101.132,54.573
U2_3: C23.1 U2.3 X2.3 | length 6.9
  Top Layer w0.15: U2.3@101.132,55.208 102.645,55.208 104.087,53.766 104.087,53.166 X2.3@104.787,52.466 105.087,52.166 C23.1@106.387,52.166
U2_14: R1.2 U2.14 | length 2.8
  Top Layer w0.145: U2.14@101.132,62.193 101.16,62.166 R1.2@103.887,62.166
U2_18: Q7.1 R50.2 U2.18 | length 57.9
  Top Layer w0.145: R50.2@79.487,95.566 80.487,94.566 v1(82.887,94.566) ; Q7.1@90.521,60.626 94.428,60.627 94.765,60.289 U2.18@95.442,60.288
  Top Layer w0.15: v1(81.187,75.466) 82.136,75.466 83.137,74.465 87.989,74.465 94.036,68.417 94.036,67.932 93.587,67.483 93.587,63.467 92.586,62.466 91.588,62.466 91.387,62.266 91.387,61.265 90.749,60.626 Q7.1@90.521,60.626
  Bottom Layer w0.15: v1(81.187,75.466) 82.238,75.466 83.236,76.467 83.887,76.467 85.888,78.466 85.888,88.666 82.888,91.666 v1(82.887,94.566)
U2_22: ARDU.2 AUX0.2 AUX1.1 GNSS_.1 U2.22 USB:.2 | length 17.8
  Top Layer w0.15: ARDU.2@86.537,57.566 86.538,58.316 88.837,58.316 89.086,58.067 89.086,57.468 89.688,56.866 93.887,56.866 94.77,57.749 U2.22@95.442,57.748 ; USB:.2@86.537,59.066 AUX0.2@86.537,53.066 ; AUX0.2@86.537,53.066 86.537,53.073 86.838,53.367 AUX0.2@86.537,53.066
U2_24: R3.1 U2.24 | length 4.1
  Top Layer w0.15: R3.1@92.087,54.566 92.888,54.567 94.801,56.479 U2.24@95.442,56.478
U3_4: C1.2 U3.4 | length 2
  Top Layer w0.4: C1.2@106.987,58.766 107.052,58.701 U3.4@108.915,58.701
U3_13: C7.2 U3.13 | length 3.6
  Top Layer w0.145: U3.13@114.859,58.701 115.553,58.702 116.038,58.217 116.037,57.066 C7.2@116.787,56.366
U5_7: C6.2 U5.7 X1.3 | length 9.4
  Top Layer w0.145: U5.7@168.255,61.346 168.867,61.346 170.386,62.865 173.188,62.865 173.188,64.267 C6.2@172.487,64.966 172.388,64.867 X1.3@171.087,64.866
U5_8: C5.2 U5.8 X1.1 | length 3.5
  Top Layer w0.145: U5.8@168.256,62.147 168.256,63.497 167.987,63.766 168.087,63.666 X1.1@169.687,63.666
U5_20: C3.1 U5.20 | length 2.3
  Top Layer w0.45: C3.1@157.387,60.066 157.697,59.756 U5.20@159.518,59.756
U6_4: C38.1 U6.4 | length 6.8
  Top Layer w0.3: C38.1@135.387,74.566 135.087,74.866 135.087,79.166 136.052,80.131 U6.4@136.759,80.131
U9_2: R55.2 U9.2 | length 3.3
  Top Layer w0.15: U9.2@133.847,99.782 133.887,99.742 133.887,96.466
U9_5: R11.2 U9.5 | length 3.1
  Top Layer w0.145: 137.587,96.666 137.587,99.712 U9.5@137.657,99.782
U10_2: R62.1 U10.2 | length 3.5
  Top Layer w0.15: R62.1@112.987,96.466 113.547,97.026 U10.2@113.547,99.782
U10_5: R21.1 U10.5 | length 3.2
  Top Layer w0.15: 117.187,96.666 117.357,96.836 U10.5@117.357,99.782
U11_7: R80.1 U11.7 | length 3.2
  Top Layer w0.145: R80.1@100.587,80.766 U11.7@103.787,80.766
U11_19: C37.2 U11.19 X3.1 | length 5.4
  Top Layer w0.145: C37.2@100.387,76.966 100.387,75.366 X3.1@100.287,75.266 100.787,74.766 U11.19@103.787,74.766
U11_20: C39.2 U11.20 X3.3 | length 8.2
  Top Layer w0.145: C39.2@98.987,71.966 98.987,72.766 X3.3@98.087,73.666 98.887,74.466 102.887,74.466 103.087,74.266 U11.20@103.787,74.266
U11_35: R84.2 U11.35 | length 16.6
  Top Layer w0.145: U11.35@109.886,70.165 109.886,69.466 112.586,66.766 114.948,66.766 115.248,66.467 120.686,66.467 R84.2@123.386,69.167
U11_36: R85.2 U11.36 | length 17
  Top Layer w0.145: U11.36@110.386,70.165 110.386,69.466 112.787,67.066 115.068,67.066 115.367,66.766 120.539,66.766 122.738,68.966 122.737,70.016 R85.2@123.386,70.665
U11_37: R86.2 U11.37 | length 17.5
  Top Layer w0.145: U11.37@110.887,70.166 110.887,69.466 112.975,67.379 115.174,67.379 115.487,67.066 120.386,67.066 122.436,69.116 122.436,70.142 122.738,70.444 122.738,71.519 R86.2@123.386,72.166
U11_38: R87.2 U11.38 | length 18
  Top Layer w0.145: U11.38@111.387,70.166 111.387,69.466 113.178,67.676 115.344,67.676 115.657,67.366 120.236,67.366 122.136,69.266 122.136,70.312 122.436,70.612 122.436,71.658 122.738,71.961 122.738,73.017 R87.2@123.386,73.665
U11_89: R83.2 U11.89 | length 1.9
  Top Layer w0.145: U11.89@110.887,85.366 110.887,86.666 R83.2@111.287,87.066
U11_90: BOOT.1 R83.1 U11.90 | length 7
  Top Layer w0.145: v1(108.987,87.066) R83.1@109.887,87.066 110.387,86.566 U11.90@110.387,85.366
  Bottom Layer w0.145: v1(108.987,87.066) BOOT.1@108.987,91.296
USB_AUX0_N: CN14.6 U2.8 U6.6 USB_AUX.6 | length 141.5
  Top Layer w0.145: v1(89.487,86.193) 89.087,85.966 82.985,85.966 77.984,80.965 74.588,80.965 73.887,80.267 73.887,78.991 75.311,77.564 88.07,77.564 98.888,66.746 98.888,59.967 100.47,58.384 U2.8@101.132,58.383 ; v1(91.687,88.966) 92.187,89.466 102.088,89.466 102.787,90.165 119.487,90.165 120.587,89.065 126.508,89.065 127.008,88.565 135.888,88.565 v1(136.337,88.916) 137.917,88.915 141.989,92.987 141.989,97.419 146.038,101.465 151.197,101.465 CN14.6@152.827,99.837 ; v1(135.687,83.266) 136.282,82.671 U6.6@136.759,82.671 U6.6@137.392,82.671
  Bottom Layer w0.145: v1(89.487,86.193) 91.687,88.395 v1(91.687,88.966) ; v1(135.687,83.266) 135.687,87.485 136.337,88.135 v1(136.337,88.916)
USB_AUX0_P: CN14.5 U2.9 U6.5 USB_AUX.7 | length 143.1
  Top Layer w0.145: USB_AUX.7@75.311,79.565 77.013,77.866 88.187,77.866 99.187,66.865 99.187,60.267 100.436,59.018 U2.9@101.132,59.018 ; USB_AUX.7@75.311,79.568 75.212,79.466 74.288,79.466 74.186,79.573 74.186,80.147 74.707,80.665 76.187,80.666 76.695,80.666 76.698,80.668 78.107,80.668 ; 78.108,80.668 83.104,85.667 89.087,85.666 v1(89.487,85.443) ; v1(92.287,88.466) 92.286,88.844 92.609,89.167 102.213,89.167 102.911,89.865 119.365,89.865 120.465,88.765 126.388,88.765 126.886,88.265 136.487,88.266 v1(136.987,88.366) 137.237,88.616 138.037,88.616 138.204,88.783 ; v1(135.687,81.866) 136.152,81.401 U6.5@136.759,81.401 ; 138.187,88.765 142.286,92.865 142.286,97.264 146.188,101.166 150.986,101.166 151.486,100.665 151.486,98.636 CN14.5@152.827,97.297
  Bottom Layer w0.145: v1(89.487,85.443) 90.087,86.043 90.087,86.374 92.179,88.466 v1(92.287,88.466) ; v1(135.687,81.866) 136.287,82.466 136.287,83.466 135.987,83.766 135.987,87.366 v1(136.987,88.366)
USB_AUX1_N: U2.6 U11.12 USB_AUX.2 | length 77.8
  Top Layer w0.145: USB_AUX.2@72.712,77.565 74.087,76.167 88.166,76.167 97.887,66.446 97.887,59.766 100.539,57.114 U2.6@101.132,57.113 ; v1(80.187,81.166) 80.387,80.966 88.987,80.966 v1(89.737,80.216) ; v1(97.337,78.516) 97.636,78.217 103.137,78.217 103.188,78.265 U11.12@103.787,78.266 U11.12@103.787,78.316
  Bottom Layer w0.145: USB_AUX.2@72.712,77.565 71.588,78.689 71.588,80.165 72.385,80.965 79.986,80.965 v1(80.187,81.166) ; v1@89.736,80.216 90.037,79.916 95.388,79.916 96.787,78.516 v1(97.337,78.516)
USB_AUX1_P: U2.7 U11.13 USB_AUX.3 | length 75.8
  Top Layer w0.145: USB_AUX.3@72.712,79.567 73.988,78.29 73.988,76.967 74.486,76.467 88.286,76.467 98.187,66.566 98.187,60.066 100.504,57.748 U2.7@101.132,57.748 ; v1(80.187,80.266) 80.587,80.665 88.786,80.665 89.188,80.267 89.188,79.667 v1(89.137,79.716) ; v1(97.337,77.716) 97.488,77.866 103.086,77.866 103.086,77.765 U11.13@103.787,77.766
  Bottom Layer w0.145: USB_AUX.3@72.712,79.567 73.811,80.666 79.787,80.666 v1(80.187,80.266) ; v1(89.137,79.716) 89.238,79.614 95.24,79.614 97.138,77.716 v1(97.337,77.716)
USB_NANO_N: U2.10 U3.6 UARDU.1 | length 9.2
  Top Layer w0.145: U2.10@101.132,59.653 101.811,59.642 104.803,56.65 107.806,56.65 108.294,56.161 U3.6@108.915,56.161
USB_NANO_P: U2.11 U3.5 UARDU.2 | length 9
  Top Layer w0.145: U2.11@101.132,60.288 103.564,60.288 106.422,57.431 U3.5@108.915,57.431
USB_RTU_N: R43.2 U2.4 USB1.2 | length 38
  Top Layer w0.145: R43.2@68.687,53.016 70.138,53.016 USB1.2@71.387,51.766 ; USB1.2@71.387,51.766 82.065,51.765 83.467,50.366 98.088,50.366 98.486,50.764 98.486,54.346 99.985,55.844 U2.4@101.132,55.843
  Top Layer w0.15: USB1.2@71.387,51.766 USB1.2@71.387,51.893
USB_RTU_P: R46.2 U2.5 USB1.3 | length 38.5
  Top Layer w0.145: R46.2@68.687,54.516 69.437,53.766 USB1.3@71.387,53.766 ; USB1.3@71.387,53.766 73.086,52.065 82.187,52.065 83.589,50.665 97.938,50.665 98.189,50.917 98.189,54.468 100.201,56.479 U2.5@101.132,56.478
USB_UP_N: CN2.2 CN13.6 U2.15 | length 58.1
  Top Layer w0.145: CN2.2@75.537,98.816 77.587,100.866 78.987,100.866 80.386,99.466 81.578,99.466 CN13.6@83.747,97.297 ; v1(83.087,75.466) 83.688,74.867 84.189,74.867 84.489,75.166 87.867,75.166 96.988,66.045 96.988,63.066 96.117,62.194 U2.15@95.442,62.193
  Bottom Layer w0.145: v1(83.087,75.466) 83.686,76.065 84.166,76.065 86.287,78.186 86.287,88.867 83.587,91.567 83.587,97.137 CN13.6@83.747,97.297
USB_UP_P: CN2.3 CN13.5 U2.16 | length 57.1
  Top Layer w0.145: CN2.3@78.037,102.316 80.517,99.836 CN13.5@83.747,99.836 ; v1(83.987,75.466) 87.986,75.466 97.288,66.164 97.288,62.768 96.078,61.558 U2.16@95.442,61.558
  Bottom Layer w0.145: CN13.5@83.747,99.837 84.887,98.697 84.887,96.865 83.887,95.865 83.887,91.686 86.587,88.986 86.587,78.067 v1(83.987,75.466)
USCL: J6.4 R4.2 U2.23 U14.6 | length 23.1
  Top Layer w0.145: R4.2@92.087,56.066 92.787,55.366 v1(92.887,55.366) ; J6.4@92.697,44.916 92.698,46.175 93.622,47.102 U14.6@95.286,47.102
  Top Layer w0.15: R4.2@92.087,56.066 93.686,56.065 94.735,57.114 U2.23@95.442,57.113
  Bottom Layer w0.145: J6.4@92.697,44.916 91.738,44.915 90.488,46.167 90.488,47.516 89.688,48.316 89.688,49.845 90.407,50.566 91.161,50.566 92.187,51.592 92.187,54.666 v1(92.887,55.366)
USDA: J6.3 R2.1 U2.27 U14.5 | length 20.8
  Top Layer w0.145: J6.3@90.157,44.916 90.158,45.166 91.087,45.166 93.338,47.417 93.338,47.965 93.744,48.372 U14.5@95.286,48.372 ; v1(91.587,51.766) 91.588,52.565 R2.1@92.087,53.066
  Top Layer w0.15: R2.1@92.087,53.066 92.388,53.365 92.586,53.365 93.795,54.574 U2.27@95.442,54.573
  Bottom Layer w0.145: J6.3@90.157,44.916 90.158,47.396 89.388,48.166 89.388,49.967 90.287,50.866 90.686,50.866 v1(91.587,51.766)
VBUS1: CN8.3 TO_PC.A4 TO_PC.A9 TO_PC.B4 TO_PC.B9 | length 51.4
  Top Layer w1.5: 195.187,125.866 195.787,125.266 v1(195.786,105.966) v1(195.786,104.165) ; CN8.3@198.857,99.066 199.286,99.065 200.988,100.767 200.988,102.466 199.088,104.366 v1(199.088,105.966) 199.088,125.293 199.987,126.166
  other v1: 199.087,104.066
VBUS2: CN9.3 CN10.3 DC/AUX.A4 DC/AUX.A9 DC/AUX.B4 DC/AUX.B9 | length 78.9
  Top Layer w1.5: 195.187,49.066 195.487,49.366 195.887,49.766 v1(195.887,51.334) v1(195.887,53.266) 194.288,54.966 194.288,57.366 195.487,58.565 CN10.3@196.317,58.566 195.888,58.565 194.587,59.866 194.587,62.366 196.487,64.266 196.487,77.366 194.587,79.266 194.587,80.836 CN9.3@196.317,82.566 ; 199.987,49.266 199.187,50.066 v1(199.187,51.366) v1(199.187,53.264) 200.988,55.065 200.987,61.766 ; 200.587,81.266 200.587,79.266 198.888,77.567 198.888,63.866 200.988,61.765
  Bottom Layer w0.6: CN9.3@196.317,82.566 197.617,81.266 v1(200.987,81.316)
  other v1: 200.387,80.966
WAS: CN5.3 OP1.1 R13.2 R58.1 WAS.4 | length 40.8
  Top Layer w0.145: v1(67.687,99.066) 68.787,99.066 ; 68.786,99.065 69.487,99.766 69.487,100.965 68.588,101.867 68.588,107.465 69.487,108.367 69.487,110.566 69.988,111.067 73.787,111.067 74.887,109.967 76.688,109.967 CN5.3@78.037,111.316 82.688,106.665 86.886,106.665 86.886,106.266 R13.2@86.787,106.366
  Bottom Layer w0.145: OP1.1@64.287,99.816 66.937,99.816 v1(67.687,99.066)
  Bottom Layer w0.5: WAS.4@62.436,98.567 62.888,98.567 63.422,99.101 64.138,99.817 OP1.1@64.287,99.816
WAS+: CN5.1 F5.2 R74.2 WAS.1 | length 36.8
  Top Layer w0.5: WAS.1@60.488,96.815 60.463,98.443 64.588,102.565 64.588,106.065 64.986,106.467 65.786,106.467 R74.2@65.987,106.666 ; R74.2@65.987,106.666 v1(65.987,107.566) ; v1(70.187,110.266) 70.487,110.566 71.487,110.566 73.387,110.566 74.587,109.366 76.487,109.366 CN5.1@78.037,107.816
  Top Layer w1: WAS.1@60.487,96.816 61.937,95.366 F5.2@68.787,95.366
  Bottom Layer w0.5: v1(65.987,107.566) 68.687,110.266 v1(70.187,110.266)
WAS_0V: CN5.4 J5.1 OP1.2 R5.2 R57.1 | length 32.7
  Top Layer w0.145: OP1.2@64.287,97.276 65.297,96.266 69.487,96.266 J5.1@71.487,94.266 ; OP1.2@64.287,97.276 65.487,98.476 65.487,101.115 65.088,101.516 65.088,102.946 65.088,103.066 65.088,105.865 65.187,105.966 66.488,105.966 66.687,106.166 66.688,106.317 66.688,108.166 68.786,110.266 ; R57.1@68.787,110.266 R5.2@68.787,111.666 69.087,111.366 75.487,111.366 CN5.4@75.537,111.316
WAS_N: C33.2 R5.1 R97.1 U1.9 U17.5 | length 208.5
  Top Layer w0.145: R5.1@68.786,113.066 69.188,112.667 78.568,112.667 79.388,111.846 79.388,110.467 82.787,107.066 88.486,107.066 v1(90.287,105.266) ; R5.1@68.787,113.066 R97.1@68.787,114.466 ; v1(89.287,88.466) 89.64,88.113 90.44,88.113 91.588,86.965 91.588,76.683 102.408,65.862 114.472,65.862 114.768,65.566 125.787,65.566 ; 124.14,65.566 125.287,65.566 v1(125.587,65.866) ; C33.2@127.186,49.766 128.339,50.917 U17.5@128.988,50.917 ; U17.5@128.988,50.917 129.536,50.917 129.636,50.917 130.087,50.466 130.087,50.191 ; 130.087,50.165 130.087,49.167 131.689,47.564 135.088,47.564 136.386,46.266 137.287,46.266 147.686,46.266 152.987,51.567 156.787,51.567 158.288,53.068 v1(158.287,53.466) ; v1(175.687,56.766) 175.987,57.066 177.386,57.066 177.887,57.567 177.887,67.165 178.786,68.064 178.786,68.867 178.288,69.365 176.688,69.365 175.987,70.066 175.987,71.986 U1.9@177.066,73.066
  Bottom Layer w0.145: v1(89.287,88.466) 89.287,88.765 89.787,89.266 90.188,89.266 91.186,90.267 91.186,95.466 90.587,96.065 90.587,98.466 90.988,98.867 90.988,104.567 v1(90.287,105.266) ; v1(125.587,65.866) 125.588,61.567 121.788,57.765 121.788,51.067 122.987,49.865 127.387,49.865 v1(127.987,50.466) ; v1(158.287,53.466) 162.088,53.467 164.087,51.468 164.087,50.785 165.405,49.466 172.187,49.466 172.888,48.765 174.587,48.765 176.487,50.665 176.487,54.066 175.687,54.867 v1(175.687,56.766)
WORK_1: R45.1 WORK.1 | length 8.5
  Top Layer w0.145: WORK.1@67.637,84.666 68.387,85.416 68.387,86.266 69.587,87.466 74.187,87.466 R45.1@74.387,87.666